# EAGLE board FeatherWIng - nRF24L01 v8 (EAGLE 9.7.0)
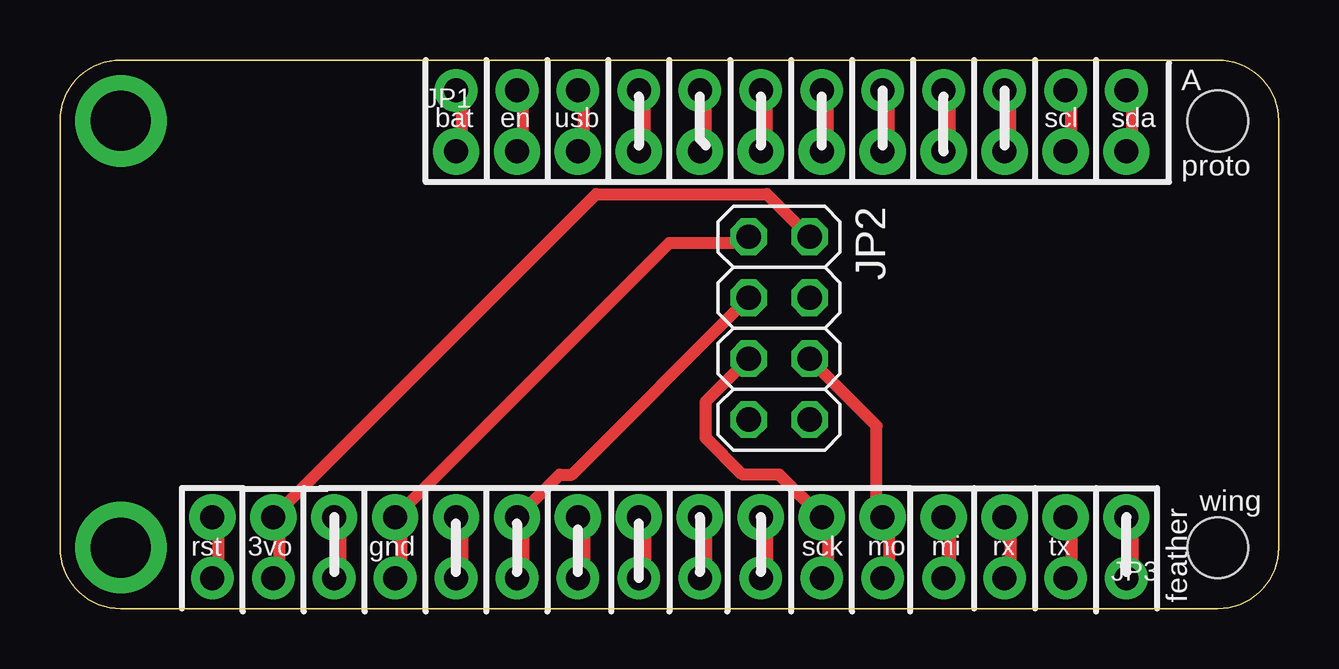
[diagram p0: board, top side]
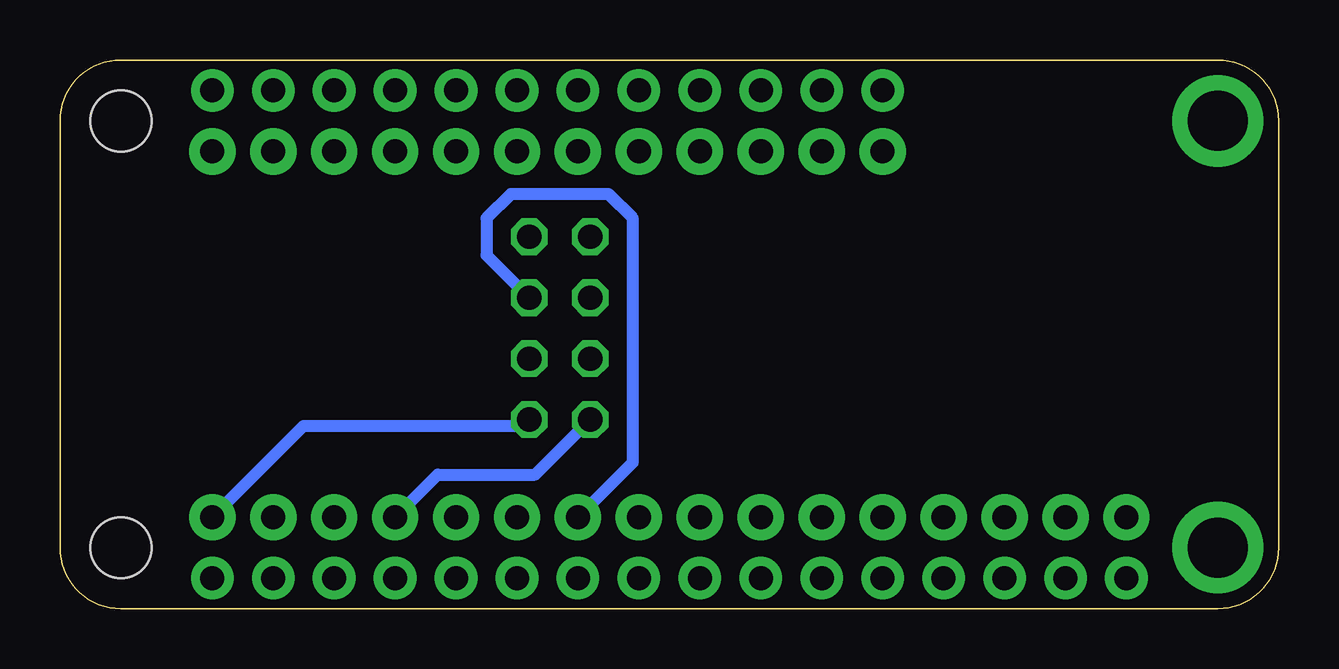
[diagram p1: board, bottom side, seen from below]

Size 50.8 x 22.86 mm. Coordinates in mm from the lower left corner, seen from the top.
Outline: 2.54,22.86 48.26,22.86 arc-90 50.8,20.32 50.8,2.54 arc-90 48.26,0 2.54,0 arc-90 0,2.54 0,20.32 arc-90 2.54,22.86
Copper layers (1*16): Top / Bottom
Stack-up Default Layer Stack: Top User Defined 0.035mm / Dielectric-1 User Defined 1.5mm / Bottom User Defined 0.035mm
Design rules: minimum copper width class=0 20mil, minimum copper width 8mil, minimum drill size 15.5mil, copper clearance class=0 to class=0 20mil, copper clearance wire_polygon to wire_polygon 8mil, copper clearance wire_polygon to pad_smd 8mil, copper clearance wire_polygon to via 8mil, copper clearance pad_smd to pad_smd 8mil, copper clearance pad_smd to via 8mil, copper clearance via to via 8mil, copper clearance smd to pad (same net) 8mil, copper clearance smd to via (same net) 8mil, copper clearance smd to smd (same net) 8mil, dimension clearance 10mil, via restrict clearance 0mil, restrict clearance 0mil, drill distance 8mil, keepout clearance 0mil
Net classes: 0 default: width 0.508 mm, clearance 0.508 mm

## Footprints (pad centres in the part's own frame; a part is rotated, then mirrored left to right if it is on the bottom)
1X12_ROUND_76MIL = drill 1 pad 1.93: 1 -13.97,0; 2 -11.43,0; 3 -8.89,0; 4 -6.35,0; 5 -3.81,0; 6 -1.27,0; 7 1.27,0; 8 3.81,0; 9 6.35,0; 10 8.89,0; 11 11.43,0; 12 13.97,0
2X04 = drill 1.016 octagon: 1 -3.81,-1.27; 2 -3.81,1.27; 3 -1.27,-1.27; 4 -1.27,1.27; 5 1.27,-1.27; 6 1.27,1.27; 7 3.81,-1.27; 8 3.81,1.27
1X16_ROUND_76MIL = drill 1 pad 1.93: 1 -19.05,0; 2 -16.51,0; 3 -13.97,0; 4 -11.43,0; 5 -8.89,0; 6 -6.35,0; 7 -3.81,0; 8 -1.27,0; 9 1.27,0; 10 3.81,0; 11 6.35,0; 12 8.89,0; 13 11.43,0; 14 13.97,0; 15 16.51,0; 16 19.05,0
FEATHERWING = drill 1 pad 1.778: 1 6.35,1.27; 2 8.89,1.27; 3 11.43,1.27; 4 13.97,1.27; 5 16.51,1.27; 6 19.05,1.27; 7 21.59,1.27; 8 24.13,1.27; 9 26.67,1.27; 10 29.21,1.27; 11 31.75,1.27; 12 34.29,1.27; 13 36.83,1.27; 14 39.37,1.27; 15 41.91,1.27; 16 44.45,1.27; 17 44.45,21.59; 18 41.91,21.59; 19 39.37,21.59; 20 36.83,21.59; 21 34.29,21.59; 22 31.75,21.59; 23 29.21,21.59; 24 26.67,21.59; 25 24.13,21.59; 26 21.59,21.59; 27 19.05,21.59; 28 16.51,21.59 | drill 2.5 pad 3.81: P$1 2.54,20.32; P$2 2.54,2.54 | hole 2.54: 48.26,20.32; 48.26,2.54

## Placement (x,y rotation side)
JP1  [1X12_ROUND_76MIL]  30.48,19.05 0 top
JP2  PINHD-2X4  [2X04]  29.97,11.68 270 top
JP3  [1X16_ROUND_76MIL]  25.4,3.81 180 top
MS1  FEATHERWING  [FEATHERWING]  0,0 0 top

## Library data of the parts
JP1 JP3 MS1 = microbuilder
JP2 = Connector; CATEGORY: Headers; DESCRIPTION: Header, Straight, 2x4 Position; MANUFACTURER: Generic; MPN: Generic; OPERATING_TEMPERATURE: Generic; PART_STATUS: Active; PITCH: 0.100" (2.54mm); ROHS_COMPLIANCE: Generic; SERIES: Generic; SUB-CATEGORY: Headers, Male Pins; TYPE: Board to Board or Cable, Unshrouded, Through Hole, Straight

## Nets
3V: JP2.2 JP3.15 MS1.2
AREF: JP3.14 MS1.3
CE: JP2.3 JP3.11 MS1.6
CNS: JP2.4 JP3.7 MS1.10
GND: JP2.1 JP3.13 MS1.4
IRQ: JP2.8 JP3.1 MS1.16
MISO: JP2.7 JP3.4 MS1.13
MOSI: JP2.6 JP3.5 MS1.12
N$1: JP1.2 MS1.27
N$3: JP1.4 MS1.25
N$4: JP3.2 MS1.15
N$5: JP1.5 MS1.24
N$6: JP3.3 MS1.14
N$11: JP3.8 MS1.9
N$12: JP3.9 MS1.8
N$13: JP3.10 MS1.7
N$15: JP3.12 MS1.5
N$18: JP3.16 MS1.1
N$19: JP1.6 MS1.23
N$20: JP1.7 MS1.22
N$21: JP1.8 MS1.21
N$22: JP1.9 MS1.20
N$23: JP1.10 MS1.19
N$24: JP1.11 MS1.18
N$25: JP1.12 MS1.17
SCK: JP2.5 JP3.6 MS1.11
USB: JP1.3 MS1.26
VBAT: JP1.1 MS1.28

## Tracks (layer width: path | path; a pad name or v marks a point on that pad's centre or on a via)
3V
  Top 0.508: JP2.2 29.46,17.27 22.35,17.27 JP3.15 9.14,3.56 9.14,1.52 MS1.2
AREF
  Top 0.508: MS1.3 11.68,1.52 11.68,3.56 JP3.14
CE
  Top 0.508: JP2.3 21.34,5.59 20.83,5.59 JP3.11 19.3,3.56 19.3,1.52 MS1.6
CNS
  Top 0.508: MS1.10 29.46,1.52 29.46,3.56 JP3.7
  Bottom 0.508: JP2.4 33.02,14.73 33.02,16.26 32,17.27 27.94,17.27 26.92,16.26 26.92,6.1 JP3.7
GND
  Top 0.508: JP2.1 28.45,15.24 25.4,15.24 JP3.13 14.22,3.56 14.22,1.52 MS1.4
IRQ
  Top 0.508: MS1.16 44.7,1.52 44.7,3.56 JP3.1
  Bottom 0.508: JP3.1 40.64,7.62 31.5,7.62 JP2.8
MISO
  Top 0.508: MS1.13 37.08,1.52 37.08,3.56 JP3.4
  Bottom 0.508: JP2.7 30.99,5.59 35.05,5.59 JP3.4
MOSI
  Top 0.508: JP2.6 34.04,7.62 34.04,4.06 JP3.5 34.54,3.56 34.54,1.52 MS1.12
N$1
  Top 0.508: MS1.27 19.3,21.34 19.3,19.3 JP1.2
N$3
  Top 0.508: MS1.25 24.38,21.34 24.38,19.3 JP1.4
N$4
  Top 0.508: MS1.15 42.16,1.52 42.16,3.56 JP3.2
N$5
  Top 0.508: MS1.24 26.92,21.34 26.92,19.3 JP1.5
N$6
  Top 0.508: MS1.14 39.62,1.52 39.62,3.56 JP3.3
N$11
  Top 0.508: MS1.9 26.92,1.52 26.92,3.56 JP3.8
N$12
  Top 0.508: MS1.8 24.38,1.52 24.38,3.56 JP3.9
N$13
  Top 0.508: MS1.7 21.84,1.52 21.84,3.56 JP3.10
N$15
  Top 0.508: MS1.5 16.76,1.52 16.76,3.56 JP3.12
N$18
  Top 0.508: MS1.1 6.6,1.52 6.6,3.56 JP3.16
N$19
  Top 0.508: MS1.23 29.46,21.34 29.46,19.3 JP1.6
N$20
  Top 0.508: MS1.22 32,21.34 32,19.3 JP1.7
N$21
  Top 0.508: MS1.21 34.54,21.34 34.54,19.3 JP1.8
N$22
  Top 0.508: MS1.20 37.08,21.34 37.08,19.3 JP1.9
N$23
  Top 0.508: MS1.19 39.62,21.34 39.62,19.3 JP1.10
N$24
  Top 0.508: MS1.18 42.16,21.34 42.16,19.3 JP1.11
N$25
  Top 0.508: MS1.17 44.7,21.34 44.7,19.3 JP1.12
SCK
  Top 0.508: JP2.5 26.92,8.64 26.92,7.11 28.45,5.59 29.97,5.59 JP3.6 32,3.56 32,1.52 MS1.11
USB
  Top 0.508: MS1.26 21.84,21.34 21.84,19.3 JP1.3
VBAT
  Top 0.508: MS1.28 16.76,21.34 16.76,19.3 JP1.1

## Text on the board
tPlace: A | bat | en | usb | scl | sda | proto | wing | rst | 3vo | gnd | sck | mo | mi | rx | tx | feather